# EAGLE board SparkFun_OpAmp_Breakout-LMV358_Panel_v16 (EAGLE 7.5.0), part 1 of 5
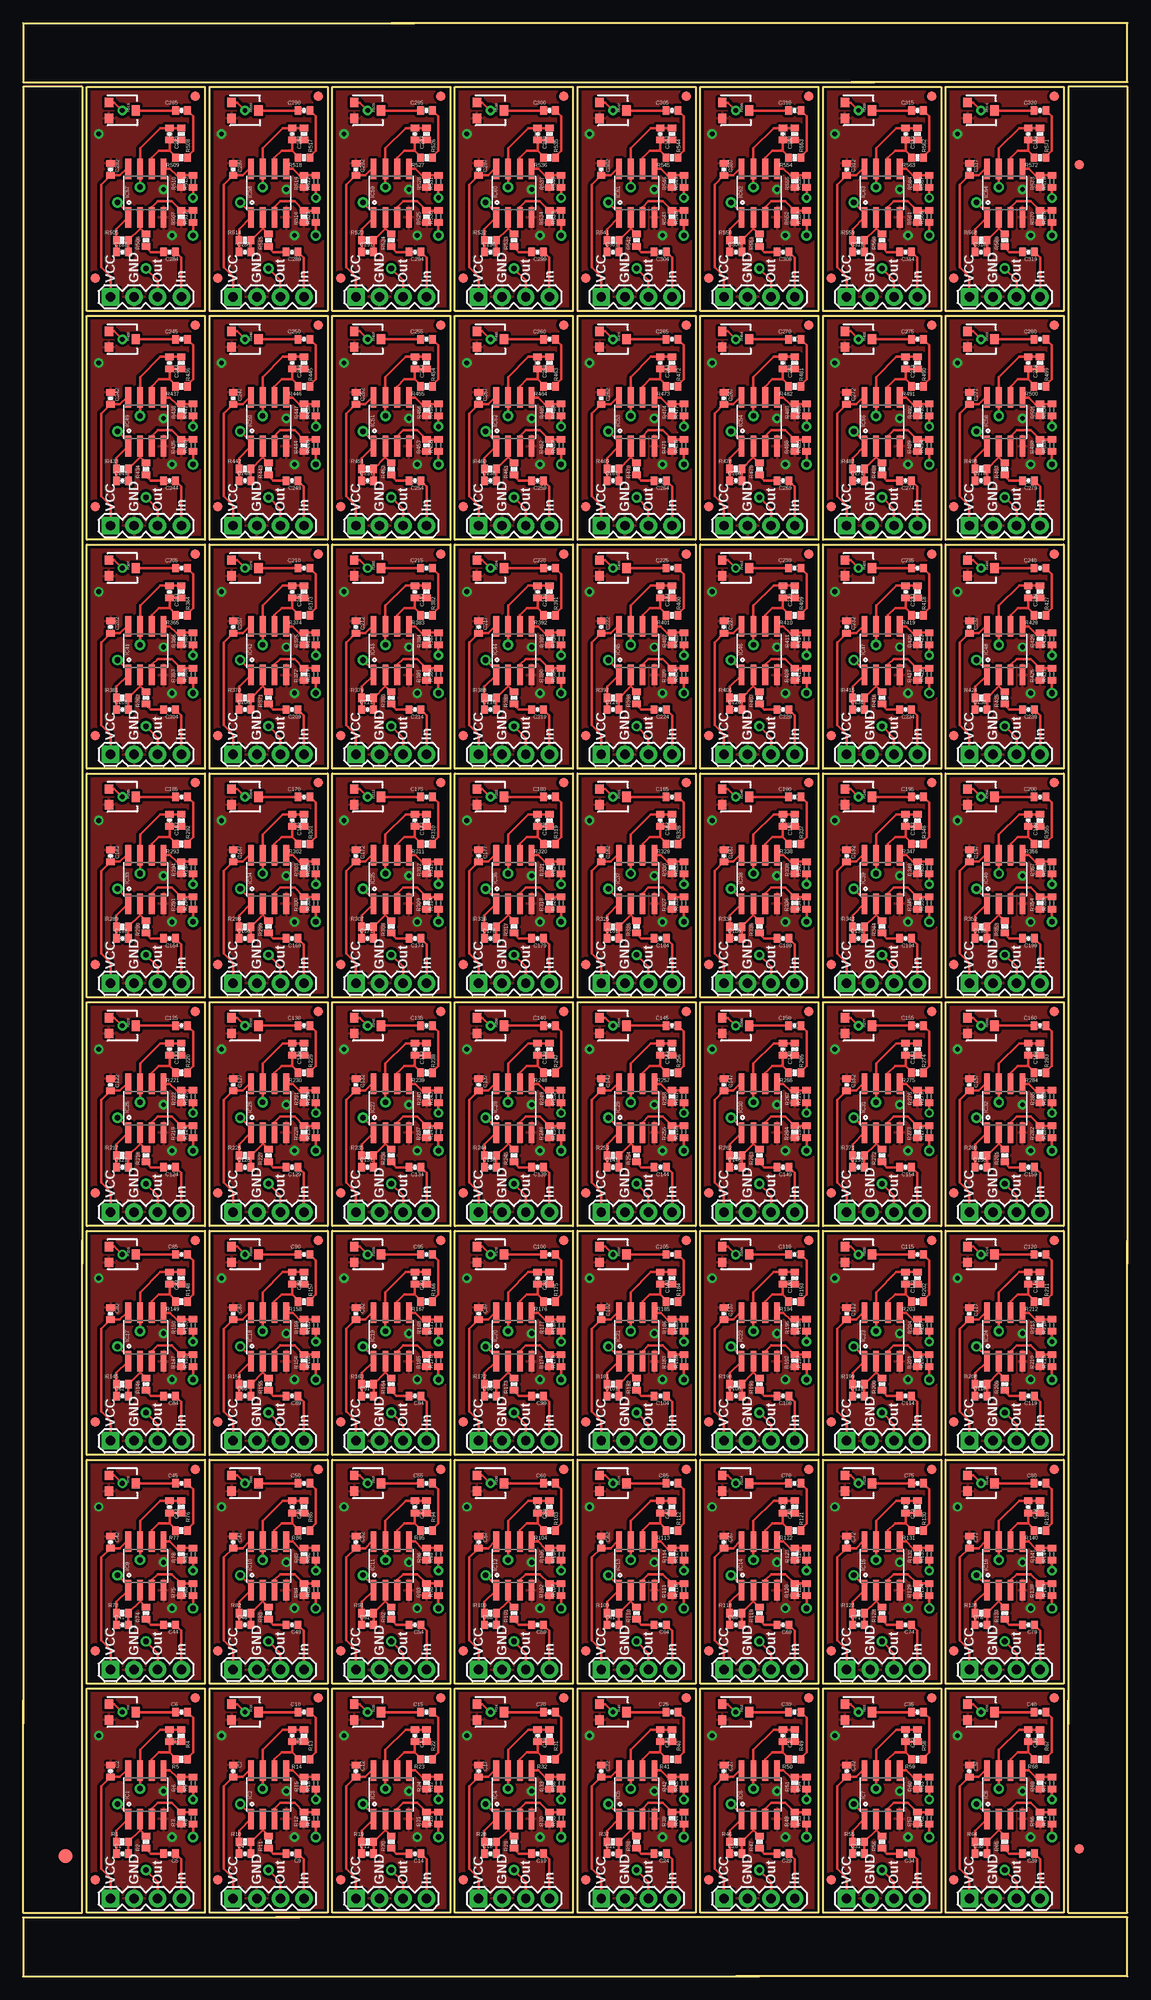
[diagram p0: board, top side]
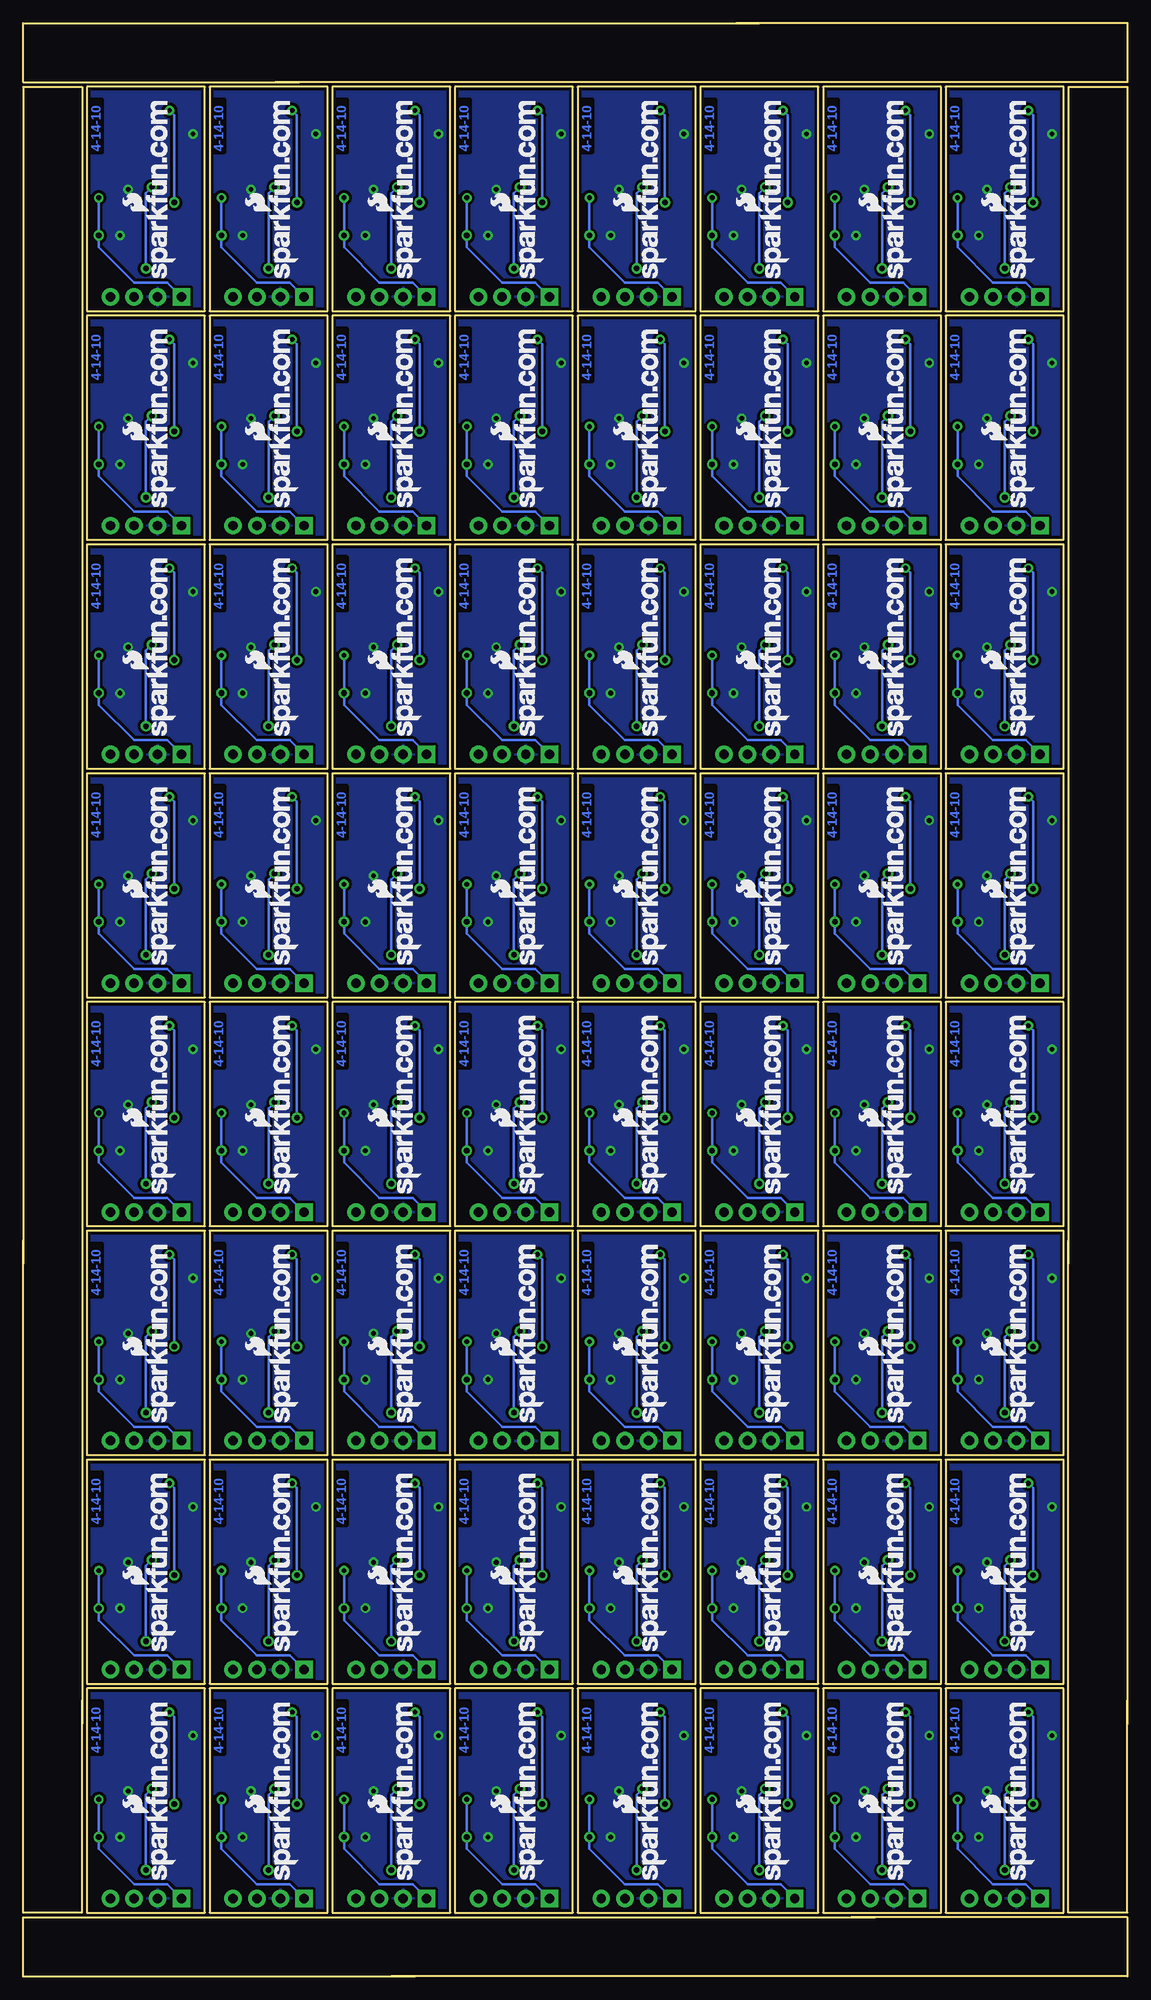
[diagram p1: board, bottom side, seen from below]

Size 118.87 x 210.31 mm. Coordinates in mm from the lower left corner, seen from the top.
Outline: 280 segments
Copper layers (1*16): Top 0.035mm / dielectric 1.5mm / Bottom 0.035mm
Design rules "SparkFun": minimum track width 8mil, minimum drill 20mil, track to track 8mil, track to pad 8mil, pad to pad 8mil, via to via 8mil, smd to smd 8mil, copper to edge 10mil, drill to drill 8mil, minimum pad ring 12mil, minimum via ring 10mil, stop-mask expansion 4mil, vias tented up to drill 25mil, thermal gap 10mil

## Footprints (pad centres in the part's own frame; a part is rotated, then mirrored left to right if it is on the bottom)
0402-CAP = smd 0.7 x 0.9: 1 -0.65,0; 2 0.65,0
FIDUCIAL-1X2 = smd 1 x 1: 1 0,0
FIDUCIAL-1.5X3 = smd 1.5 x 1.5: 1 0,0
SO08 = smd 0.61 x 2.21: 1 -1.905,-2.616; 2 -0.635,-2.616; 3 0.635,-2.616; 4 1.905,-2.616; 5 1.905,2.616; 6 0.635,2.616; 7 -0.635,2.616; 8 -1.905,2.616
1X04 = drill 1.016 pad 1.88 square: 1 0,0 | drill 1.016 pad 1.88: 2 2.54,0; 3 5.08,0; 4 7.62,0
0402-RES = smd 0.7 x 0.9: 1 -0.65,0; 2 0.65,0
TRIMPOT-3MM = smd 1 x 0.9: 1 -0.85,-1.45; 3 0.85,-1.45 | smd 1.1 x 0.9: 2 0,1.45
C0402 = smd 0.7 x 0.9: 1 -0.65,0; 2 0.65,0

## Placement (x,y rotation side)
C1  100pF  [0402-CAP]  10.67,13.21 180 top
C2  0.1uF  [0402-CAP]  9.4,22.1 90 top
C3  100pF  [0402-CAP]  15.75,25.91 90 top
C4  100pF  [0402-CAP]  23.88,13.21 180 top
C5  1uF  [0402-CAP]  15.75,13.21 180 top
C6  1uF  [0402-CAP]  17.02,28.45 180 top
C7  0.1uF  [0402-CAP]  22.61,22.1 90 top
C8  100pF  [0402-CAP]  28.96,25.91 90 top
C9  1uF  [0402-CAP]  28.96,13.21 180 top
C10  1uF  [0402-CAP]  30.23,28.45 180 top
C11  100pF  [0402-CAP]  37.08,13.21 180 top
C12  0.1uF  [0402-CAP]  35.81,22.1 90 top
C13  100pF  [0402-CAP]  42.16,25.91 90 top
C14  1uF  [0402-CAP]  42.16,13.21 180 top
C15  1uF  [0402-CAP]  43.43,28.45 180 top
C16  100pF  [0402-CAP]  50.29,13.21 180 top
C17  0.1uF  [0402-CAP]  49.02,22.1 90 top
C18  100pF  [0402-CAP]  55.37,25.91 90 top
C19  1uF  [0402-CAP]  55.37,13.21 180 top
C20  1uF  [0402-CAP]  56.64,28.45 180 top
C21  100pF  [0402-CAP]  63.5,13.21 180 top
C22  0.1uF  [0402-CAP]  62.23,22.1 90 top
C23  100pF  [0402-CAP]  68.58,25.91 90 top
C24  1uF  [0402-CAP]  68.58,13.21 180 top
C25  1uF  [0402-CAP]  69.85,28.45 180 top
C26  100pF  [0402-CAP]  76.71,13.21 180 top
C27  0.1uF  [0402-CAP]  75.44,22.1 90 top
C28  100pF  [0402-CAP]  81.79,25.91 90 top
C29  1uF  [0402-CAP]  81.79,13.21 180 top
C30  1uF  [0402-CAP]  83.06,28.45 180 top
C31  100pF  [0402-CAP]  89.92,13.21 180 top
C32  0.1uF  [0402-CAP]  88.65,22.1 90 top
C33  100pF  [0402-CAP]  95,25.91 90 top
C34  1uF  [0402-CAP]  95,13.21 180 top
C35  1uF  [0402-CAP]  96.27,28.45 180 top
C36  100pF  [0402-CAP]  103.12,13.21 180 top
C37  0.1uF  [0402-CAP]  101.85,22.1 90 top
C38  100pF  [0402-CAP]  108.2,25.91 90 top
C39  1uF  [0402-CAP]  108.2,13.21 180 top
C40  1uF  [0402-CAP]  109.47,28.45 180 top
C41  100pF  [0402-CAP]  10.67,37.85 180 top
C42  0.1uF  [0402-CAP]  9.4,46.74 90 top
C43  100pF  [0402-CAP]  15.75,50.55 90 top
C44  1uF  [0402-CAP]  15.75,37.85 180 top
C45  1uF  [0402-CAP]  17.02,53.09 180 top
C46  100pF  [0402-CAP]  23.88,37.85 180 top
C47  0.1uF  [0402-CAP]  22.61,46.74 90 top
C48  100pF  [0402-CAP]  28.96,50.55 90 top
C49  1uF  [0402-CAP]  28.96,37.85 180 top
C50  1uF  [0402-CAP]  30.23,53.09 180 top
C51  100pF  [0402-CAP]  37.08,37.85 180 top
C52  0.1uF  [0402-CAP]  35.81,46.74 90 top
C53  100pF  [0402-CAP]  42.16,50.55 90 top
C54  1uF  [0402-CAP]  42.16,37.85 180 top
C55  1uF  [0402-CAP]  43.43,53.09 180 top
C56  100pF  [0402-CAP]  50.29,37.85 180 top
C57  0.1uF  [0402-CAP]  49.02,46.74 90 top
C58  100pF  [0402-CAP]  55.37,50.55 90 top
C59  1uF  [0402-CAP]  55.37,37.85 180 top
C60  1uF  [0402-CAP]  56.64,53.09 180 top
C61  100pF  [0402-CAP]  63.5,37.85 180 top
C62  0.1uF  [0402-CAP]  62.23,46.74 90 top
C63  100pF  [0402-CAP]  68.58,50.55 90 top
C64  1uF  [0402-CAP]  68.58,37.85 180 top
C65  1uF  [0402-CAP]  69.85,53.09 180 top
C66  100pF  [0402-CAP]  76.71,37.85 180 top
C67  0.1uF  [0402-CAP]  75.44,46.74 90 top
C68  100pF  [0402-CAP]  81.79,50.55 90 top
C69  1uF  [0402-CAP]  81.79,37.85 180 top
C70  1uF  [0402-CAP]  83.06,53.09 180 top
C71  100pF  [0402-CAP]  89.92,37.85 180 top
C72  0.1uF  [0402-CAP]  88.65,46.74 90 top
C73  100pF  [0402-CAP]  95,50.55 90 top
C74  1uF  [0402-CAP]  95,37.85 180 top
C75  1uF  [0402-CAP]  96.27,53.09 180 top
C76  100pF  [0402-CAP]  103.12,37.85 180 top
C77  0.1uF  [0402-CAP]  101.85,46.74 90 top
C78  100pF  [0402-CAP]  108.2,50.55 90 top
C79  1uF  [0402-CAP]  108.2,37.85 180 top
C80  1uF  [0402-CAP]  109.47,53.09 180 top
C81  100pF  [0402-CAP]  10.67,62.48 180 top
C82  0.1uF  [0402-CAP]  9.4,71.37 90 top
C83  100pF  [0402-CAP]  15.75,75.18 90 top
C84  1uF  [0402-CAP]  15.75,62.48 180 top
C85  1uF  [0402-CAP]  17.02,77.72 180 top
C86  100pF  [0402-CAP]  23.88,62.48 180 top
C87  0.1uF  [0402-CAP]  22.61,71.37 90 top
C88  100pF  [0402-CAP]  28.96,75.18 90 top
C89  1uF  [0402-CAP]  28.96,62.48 180 top
C90  1uF  [0402-CAP]  30.23,77.72 180 top
C91  100pF  [0402-CAP]  37.08,62.48 180 top
C92  0.1uF  [0402-CAP]  35.81,71.37 90 top
C93  100pF  [0402-CAP]  42.16,75.18 90 top
C94  1uF  [0402-CAP]  42.16,62.48 180 top
C95  1uF  [0402-CAP]  43.43,77.72 180 top
C96  100pF  [0402-CAP]  50.29,62.48 180 top
C97  0.1uF  [0402-CAP]  49.02,71.37 90 top
C98  100pF  [0402-CAP]  55.37,75.18 90 top
C99  1uF  [0402-CAP]  55.37,62.48 180 top
C100  1uF  [0402-CAP]  56.64,77.72 180 top
C101  100pF  [0402-CAP]  63.5,62.48 180 top
C102  0.1uF  [0402-CAP]  62.23,71.37 90 top
C103  100pF  [0402-CAP]  68.58,75.18 90 top
C104  1uF  [0402-CAP]  68.58,62.48 180 top
C105  1uF  [0402-CAP]  69.85,77.72 180 top
C106  100pF  [0402-CAP]  76.71,62.48 180 top
C107  0.1uF  [0402-CAP]  75.44,71.37 90 top
C108  100pF  [0402-CAP]  81.79,75.18 90 top
C109  1uF  [0402-CAP]  81.79,62.48 180 top
C110  1uF  [0402-CAP]  83.06,77.72 180 top
C111  100pF  [0402-CAP]  89.92,62.48 180 top
C112  0.1uF  [0402-CAP]  88.65,71.37 90 top
C113  100pF  [0402-CAP]  95,75.18 90 top
C114  1uF  [0402-CAP]  95,62.48 180 top
C115  1uF  [0402-CAP]  96.27,77.72 180 top
C116  100pF  [0402-CAP]  103.12,62.48 180 top
C117  0.1uF  [0402-CAP]  101.85,71.37 90 top
C118  100pF  [0402-CAP]  108.2,75.18 90 top
C119  1uF  [0402-CAP]  108.2,62.48 180 top
C120  1uF  [0402-CAP]  109.47,77.72 180 top
C121  100pF  [0402-CAP]  10.67,87.12 180 top
C122  0.1uF  [0402-CAP]  9.4,96.01 90 top
C123  100pF  [0402-CAP]  15.75,99.82 90 top
C124  1uF  [0402-CAP]  15.75,87.12 180 top
C125  1uF  [0402-CAP]  17.02,102.36 180 top
C126  100pF  [0402-CAP]  23.88,87.12 180 top
C127  0.1uF  [0402-CAP]  22.61,96.01 90 top
C128  100pF  [0402-CAP]  28.96,99.82 90 top
C129  1uF  [0402-CAP]  28.96,87.12 180 top
C130  1uF  [0402-CAP]  30.23,102.36 180 top
C131  100pF  [0402-CAP]  37.08,87.12 180 top
C132  0.1uF  [0402-CAP]  35.81,96.01 90 top
C133  100pF  [0402-CAP]  42.16,99.82 90 top
C134  1uF  [0402-CAP]  42.16,87.12 180 top
C135  1uF  [0402-CAP]  43.43,102.36 180 top
C136  100pF  [0402-CAP]  50.29,87.12 180 top
C137  0.1uF  [0402-CAP]  49.02,96.01 90 top
C138  100pF  [0402-CAP]  55.37,99.82 90 top
C139  1uF  [0402-CAP]  55.37,87.12 180 top
C140  1uF  [0402-CAP]  56.64,102.36 180 top
C141  100pF  [0402-CAP]  63.5,87.12 180 top
C142  0.1uF  [0402-CAP]  62.23,96.01 90 top
C143  100pF  [0402-CAP]  68.58,99.82 90 top
C144  1uF  [0402-CAP]  68.58,87.12 180 top
C145  1uF  [0402-CAP]  69.85,102.36 180 top
C146  100pF  [0402-CAP]  76.71,87.12 180 top
C147  0.1uF  [0402-CAP]  75.44,96.01 90 top
C148  100pF  [0402-CAP]  81.79,99.82 90 top
C149  1uF  [0402-CAP]  81.79,87.12 180 top
C150  1uF  [0402-CAP]  83.06,102.36 180 top
C151  100pF  [0402-CAP]  89.92,87.12 180 top
C152  0.1uF  [0402-CAP]  88.65,96.01 90 top
C153  100pF  [0402-CAP]  95,99.82 90 top
C154  1uF  [0402-CAP]  95,87.12 180 top
C155  1uF  [0402-CAP]  96.27,102.36 180 top
C156  100pF  [0402-CAP]  103.12,87.12 180 top
C157  0.1uF  [0402-CAP]  101.85,96.01 90 top
C158  100pF  [0402-CAP]  108.2,99.82 90 top
C159  1uF  [0402-CAP]  108.2,87.12 180 top
C160  1uF  [0402-CAP]  109.47,102.36 180 top
C161  100pF  [0402-CAP]  10.67,111.76 180 top
C162  0.1uF  [0402-CAP]  9.4,120.65 90 top
C163  100pF  [0402-CAP]  15.75,124.46 90 top
C164  1uF  [0402-CAP]  15.75,111.76 180 top
C165  1uF  [0402-CAP]  17.02,127 180 top
C166  100pF  [0402-CAP]  23.88,111.76 180 top
C167  0.1uF  [0402-CAP]  22.61,120.65 90 top
C168  100pF  [0402-CAP]  28.96,124.46 90 top
C169  1uF  [0402-CAP]  28.96,111.76 180 top
C170  1uF  [0402-CAP]  30.23,127 180 top
C171  100pF  [0402-CAP]  37.08,111.76 180 top
C172  0.1uF  [0402-CAP]  35.81,120.65 90 top
C173  100pF  [0402-CAP]  42.16,124.46 90 top
C174  1uF  [0402-CAP]  42.16,111.76 180 top
C175  1uF  [0402-CAP]  43.43,127 180 top
C176  100pF  [0402-CAP]  50.29,111.76 180 top
C177  0.1uF  [0402-CAP]  49.02,120.65 90 top
C178  100pF  [0402-CAP]  55.37,124.46 90 top
C179  1uF  [0402-CAP]  55.37,111.76 180 top
C180  1uF  [0402-CAP]  56.64,127 180 top
C181  100pF  [0402-CAP]  63.5,111.76 180 top
C182  0.1uF  [0402-CAP]  62.23,120.65 90 top
C183  100pF  [0402-CAP]  68.58,124.46 90 top
C184  1uF  [0402-CAP]  68.58,111.76 180 top
C185  1uF  [0402-CAP]  69.85,127 180 top
C186  100pF  [0402-CAP]  76.71,111.76 180 top
C187  0.1uF  [0402-CAP]  75.44,120.65 90 top
C188  100pF  [0402-CAP]  81.79,124.46 90 top
C189  1uF  [0402-CAP]  81.79,111.76 180 top
C190  1uF  [0402-CAP]  83.06,127 180 top
C191  100pF  [0402-CAP]  89.92,111.76 180 top
C192  0.1uF  [0402-CAP]  88.65,120.65 90 top
C193  100pF  [0402-CAP]  95,124.46 90 top
C194  1uF  [0402-CAP]  95,111.76 180 top
C195  1uF  [0402-CAP]  96.27,127 180 top
C196  100pF  [0402-CAP]  103.12,111.76 180 top
C197  0.1uF  [0402-CAP]  101.85,120.65 90 top
C198  100pF  [0402-CAP]  108.2,124.46 90 top
C199  1uF  [0402-CAP]  108.2,111.76 180 top
C200  1uF  [0402-CAP]  109.47,127 180 top
C201  100pF  [0402-CAP]  10.67,136.4 180 top
C202  0.1uF  [0402-CAP]  9.4,145.29 90 top
C203  100pF  [0402-CAP]  15.75,149.1 90 top
C204  1uF  [0402-CAP]  15.75,136.4 180 top
C205  1uF  [0402-CAP]  17.02,151.64 180 top
C206  100pF  [0402-CAP]  23.88,136.4 180 top
C207  0.1uF  [0402-CAP]  22.61,145.29 90 top
C208  100pF  [0402-CAP]  28.96,149.1 90 top
C209  1uF  [0402-CAP]  28.96,136.4 180 top
C210  1uF  [0402-CAP]  30.23,151.64 180 top
C211  100pF  [0402-CAP]  37.08,136.4 180 top
C212  0.1uF  [0402-CAP]  35.81,145.29 90 top
C213  100pF  [0402-CAP]  42.16,149.1 90 top
C214  1uF  [0402-CAP]  42.16,136.4 180 top
C215  1uF  [0402-CAP]  43.43,151.64 180 top
C216  100pF  [0402-CAP]  50.29,136.4 180 top
C217  0.1uF  [0402-CAP]  49.02,145.29 90 top
C218  100pF  [0402-CAP]  55.37,149.1 90 top
C219  1uF  [0402-CAP]  55.37,136.4 180 top
C220  1uF  [0402-CAP]  56.64,151.64 180 top
C221  100pF  [0402-CAP]  63.5,136.4 180 top
C222  0.1uF  [0402-CAP]  62.23,145.29 90 top
C223  100pF  [0402-CAP]  68.58,149.1 90 top
C224  1uF  [0402-CAP]  68.58,136.4 180 top
C225  1uF  [0402-CAP]  69.85,151.64 180 top
C226  100pF  [0402-CAP]  76.71,136.4 180 top
C227  0.1uF  [0402-CAP]  75.44,145.29 90 top
C228  100pF  [0402-CAP]  81.79,149.1 90 top
C229  1uF  [0402-CAP]  81.79,136.4 180 top
C230  1uF  [0402-CAP]  83.06,151.64 180 top
C231  100pF  [0402-CAP]  89.92,136.4 180 top
C232  0.1uF  [0402-CAP]  88.65,145.29 90 top
C233  100pF  [0402-CAP]  95,149.1 90 top
C234  1uF  [0402-CAP]  95,136.4 180 top
C235  1uF  [0402-CAP]  96.27,151.64 180 top
C236  100pF  [0402-CAP]  103.12,136.4 180 top
C237  0.1uF  [0402-CAP]  101.85,145.29 90 top
C238  100pF  [0402-CAP]  108.2,149.1 90 top
C239  1uF  [0402-CAP]  108.2,136.4 180 top
C240  1uF  [0402-CAP]  109.47,151.64 180 top
C241  100pF  [0402-CAP]  10.67,161.04 180 top
C242  0.1uF  [0402-CAP]  9.4,169.93 90 top
C243  100pF  [0402-CAP]  15.75,173.74 90 top
C244  1uF  [0402-CAP]  15.75,161.04 180 top
C245  1uF  [0402-CAP]  17.02,176.28 180 top
C246  100pF  [0402-CAP]  23.88,161.04 180 top
C247  0.1uF  [0402-CAP]  22.61,169.93 90 top
C248  100pF  [0402-CAP]  28.96,173.74 90 top
C249  1uF  [0402-CAP]  28.96,161.04 180 top
C250  1uF  [0402-CAP]  30.23,176.28 180 top
C251  100pF  [0402-CAP]  37.08,161.04 180 top
C252  0.1uF  [0402-CAP]  35.81,169.93 90 top
C253  100pF  [0402-CAP]  42.16,173.74 90 top
C254  1uF  [0402-CAP]  42.16,161.04 180 top
C255  1uF  [0402-CAP]  43.43,176.28 180 top
C256  100pF  [0402-CAP]  50.29,161.04 180 top
C257  0.1uF  [0402-CAP]  49.02,169.93 90 top
C258  100pF  [0402-CAP]  55.37,173.74 90 top
C259  1uF  [0402-CAP]  55.37,161.04 180 top
C260  1uF  [0402-CAP]  56.64,176.28 180 top
C261  100pF  [0402-CAP]  63.5,161.04 180 top
C262  0.1uF  [0402-CAP]  62.23,169.93 90 top
C263  100pF  [0402-CAP]  68.58,173.74 90 top
C264  1uF  [0402-CAP]  68.58,161.04 180 top
C265  1uF  [0402-CAP]  69.85,176.28 180 top
C266  100pF  [0402-CAP]  76.71,161.04 180 top
C267  0.1uF  [0402-CAP]  75.44,169.93 90 top
C268  100pF  [0402-CAP]  81.79,173.74 90 top
C269  1uF  [0402-CAP]  81.79,161.04 180 top
C270  1uF  [0402-CAP]  83.06,176.28 180 top
C271  100pF  [0402-CAP]  89.92,161.04 180 top
C272  0.1uF  [0402-CAP]  88.65,169.93 90 top
C273  100pF  [0402-CAP]  95,173.74 90 top
C274  1uF  [0402-CAP]  95,161.04 180 top
C275  1uF  [0402-CAP]  96.27,176.28 180 top
C276  100pF  [0402-CAP]  103.12,161.04 180 top
C277  0.1uF  [0402-CAP]  101.85,169.93 90 top
C278  100pF  [0402-CAP]  108.2,173.74 90 top
C279  1uF  [0402-CAP]  108.2,161.04 180 top
C280  1uF  [0402-CAP]  109.47,176.28 180 top
C281  100pF  [0402-CAP]  10.67,185.67 180 top
C282  0.1uF  [0402-CAP]  9.4,194.56 90 top
C283  100pF  [0402-CAP]  15.75,198.37 90 top
C284  1uF  [0402-CAP]  15.75,185.67 180 top
C285  1uF  [0402-CAP]  17.02,200.91 180 top
C286  100pF  [0402-CAP]  23.88,185.67 180 top
C287  0.1uF  [0402-CAP]  22.61,194.56 90 top
C288  100pF  [0402-CAP]  28.96,198.37 90 top
C289  1uF  [0402-CAP]  28.96,185.67 180 top
C290  1uF  [0402-CAP]  30.23,200.91 180 top
C291  100pF  [0402-CAP]  37.08,185.67 180 top
C292  0.1uF  [0402-CAP]  35.81,194.56 90 top
C293  100pF  [0402-CAP]  42.16,198.37 90 top
C294  1uF  [0402-CAP]  42.16,185.67 180 top
C295  1uF  [0402-CAP]  43.43,200.91 180 top
C296  100pF  [0402-CAP]  50.29,185.67 180 top
C297  0.1uF  [0402-CAP]  49.02,194.56 90 top
C298  100pF  [0402-CAP]  55.37,198.37 90 top
C299  1uF  [0402-CAP]  55.37,185.67 180 top
C300  1uF  [0402-CAP]  56.64,200.91 180 top
C301  100pF  [0402-CAP]  63.5,185.67 180 top
C302  0.1uF  [0402-CAP]  62.23,194.56 90 top
C303  100pF  [0402-CAP]  68.58,198.37 90 top
C304  1uF  [0402-CAP]  68.58,185.67 180 top
C305  1uF  [0402-CAP]  69.85,200.91 180 top
C306  100pF  [0402-CAP]  76.71,185.67 180 top
C307  0.1uF  [0402-CAP]  75.44,194.56 90 top
C308  100pF  [0402-CAP]  81.79,198.37 90 top
C309  1uF  [0402-CAP]  81.79,185.67 180 top
C310  1uF  [0402-CAP]  83.06,200.91 180 top
C311  100pF  [0402-CAP]  89.92,185.67 180 top
C312  0.1uF  [0402-CAP]  88.65,194.56 90 top
C313  100pF  [0402-CAP]  95,198.37 90 top
C314  1uF  [0402-CAP]  95,185.67 180 top
C315  1uF  [0402-CAP]  96.27,200.91 180 top
C316  100pF  [0402-CAP]  103.12,185.67 180 top
C317  0.1uF  [0402-CAP]  101.85,194.56 90 top
C318  100pF  [0402-CAP]  108.2,198.37 90 top
C319  1uF  [0402-CAP]  108.2,185.67 180 top
C320  1uF  [0402-CAP]  109.47,200.91 180 top
E$1  [FIDUCIAL-1X2]  18.54,29.97 0 top
E$2  [FIDUCIAL-1X2]  7.75,10.41 0 top
E$3  [FIDUCIAL-1X2]  31.75,29.97 0 top
E$4  [FIDUCIAL-1X2]  20.95,10.41 0 top
E$5  [FIDUCIAL-1X2]  44.96,29.97 0 top
E$6  [FIDUCIAL-1X2]  34.16,10.41 0 top
E$7  [FIDUCIAL-1X2]  58.17,29.97 0 top
E$8  [FIDUCIAL-1X2]  47.37,10.41 0 top
E$9  [FIDUCIAL-1X2]  71.37,29.97 0 top
E$10  [FIDUCIAL-1X2]  60.58,10.41 0 top
E$11  [FIDUCIAL-1X2]  84.58,29.97 0 top
E$12  [FIDUCIAL-1X2]  73.79,10.41 0 top
E$13  [FIDUCIAL-1X2]  97.79,29.97 0 top
E$14  [FIDUCIAL-1X2]  87,10.41 0 top
E$15  [FIDUCIAL-1X2]  111,29.97 0 top
E$16  [FIDUCIAL-1X2]  100.2,10.41 0 top
E$17  [FIDUCIAL-1X2]  18.54,54.61 0 top
E$18  [FIDUCIAL-1X2]  7.75,35.05 0 top
E$19  [FIDUCIAL-1X2]  31.75,54.61 0 top
E$20  [FIDUCIAL-1X2]  20.95,35.05 0 top
E$21  [FIDUCIAL-1X2]  44.96,54.61 0 top
E$22  [FIDUCIAL-1X2]  34.16,35.05 0 top
E$23  [FIDUCIAL-1X2]  58.17,54.61 0 top
E$24  [FIDUCIAL-1X2]  47.37,35.05 0 top
E$25  [FIDUCIAL-1X2]  71.37,54.61 0 top
E$26  [FIDUCIAL-1X2]  60.58,35.05 0 top
E$27  [FIDUCIAL-1X2]  84.58,54.61 0 top
E$28  [FIDUCIAL-1X2]  73.79,35.05 0 top
E$29  [FIDUCIAL-1X2]  97.79,54.61 0 top
E$30  [FIDUCIAL-1X2]  87,35.05 0 top
E$31  [FIDUCIAL-1X2]  111,54.61 0 top
E$32  [FIDUCIAL-1X2]  100.2,35.05 0 top
E$33  [FIDUCIAL-1X2]  18.54,79.25 0 top
E$34  [FIDUCIAL-1X2]  7.75,59.69 0 top
E$35  [FIDUCIAL-1X2]  31.75,79.25 0 top
E$36  [FIDUCIAL-1X2]  20.95,59.69 0 top
E$37  [FIDUCIAL-1X2]  44.96,79.25 0 top
E$38  [FIDUCIAL-1X2]  34.16,59.69 0 top
E$39  [FIDUCIAL-1X2]  58.17,79.25 0 top
E$40  [FIDUCIAL-1X2]  47.37,59.69 0 top
E$41  [FIDUCIAL-1X2]  71.37,79.25 0 top
E$42  [FIDUCIAL-1X2]  60.58,59.69 0 top
E$43  [FIDUCIAL-1X2]  84.58,79.25 0 top
E$44  [FIDUCIAL-1X2]  73.79,59.69 0 top
E$45  [FIDUCIAL-1X2]  97.79,79.25 0 top
E$46  [FIDUCIAL-1X2]  87,59.69 0 top
E$47  [FIDUCIAL-1X2]  111,79.25 0 top
E$48  [FIDUCIAL-1X2]  100.2,59.69 0 top
E$49  [FIDUCIAL-1X2]  18.54,103.89 0 top
E$50  [FIDUCIAL-1X2]  7.75,84.33 0 top
E$51  [FIDUCIAL-1X2]  31.75,103.89 0 top
E$52  [FIDUCIAL-1X2]  20.95,84.33 0 top
E$53  [FIDUCIAL-1X2]  44.96,103.89 0 top
E$54  [FIDUCIAL-1X2]  34.16,84.33 0 top
E$55  [FIDUCIAL-1X2]  58.17,103.89 0 top
E$56  [FIDUCIAL-1X2]  47.37,84.33 0 top
E$57  [FIDUCIAL-1X2]  71.37,103.89 0 top
E$58  [FIDUCIAL-1X2]  60.58,84.33 0 top
E$59  [FIDUCIAL-1X2]  84.58,103.89 0 top
E$60  [FIDUCIAL-1X2]  73.79,84.33 0 top
E$61  [FIDUCIAL-1X2]  97.79,103.89 0 top
E$62  [FIDUCIAL-1X2]  87,84.33 0 top
E$63  [FIDUCIAL-1X2]  111,103.89 0 top
E$64  [FIDUCIAL-1X2]  100.2,84.33 0 top
E$65  [FIDUCIAL-1X2]  18.54,128.52 0 top
E$66  [FIDUCIAL-1X2]  7.75,108.97 0 top
E$67  [FIDUCIAL-1X2]  31.75,128.52 0 top
E$68  [FIDUCIAL-1X2]  20.95,108.97 0 top
E$69  [FIDUCIAL-1X2]  44.96,128.52 0 top
E$70  [FIDUCIAL-1X2]  34.16,108.97 0 top
E$71  [FIDUCIAL-1X2]  58.17,128.52 0 top
E$72  [FIDUCIAL-1X2]  47.37,108.97 0 top
E$73  [FIDUCIAL-1X2]  71.37,128.52 0 top
E$74  [FIDUCIAL-1X2]  60.58,108.97 0 top
E$75  [FIDUCIAL-1X2]  84.58,128.52 0 top
E$76  [FIDUCIAL-1X2]  73.79,108.97 0 top
E$77  [FIDUCIAL-1X2]  97.79,128.52 0 top
E$78  [FIDUCIAL-1X2]  87,108.97 0 top
E$79  [FIDUCIAL-1X2]  111,128.52 0 top
E$80  [FIDUCIAL-1X2]  100.2,108.97 0 top
E$81  [FIDUCIAL-1X2]  18.54,153.16 0 top
E$82  [FIDUCIAL-1X2]  7.75,133.6 0 top
E$83  [FIDUCIAL-1X2]  31.75,153.16 0 top
E$84  [FIDUCIAL-1X2]  20.95,133.6 0 top
E$85  [FIDUCIAL-1X2]  44.96,153.16 0 top
E$86  [FIDUCIAL-1X2]  34.16,133.6 0 top
E$87  [FIDUCIAL-1X2]  58.17,153.16 0 top
E$88  [FIDUCIAL-1X2]  47.37,133.6 0 top
E$89  [FIDUCIAL-1X2]  71.37,153.16 0 top
E$90  [FIDUCIAL-1X2]  60.58,133.6 0 top
E$91  [FIDUCIAL-1X2]  84.58,153.16 0 top
E$92  [FIDUCIAL-1X2]  73.79,133.6 0 top
E$93  [FIDUCIAL-1X2]  97.79,153.16 0 top
E$94  [FIDUCIAL-1X2]  87,133.6 0 top
E$95  [FIDUCIAL-1X2]  111,153.16 0 top
E$96  [FIDUCIAL-1X2]  100.2,133.6 0 top
E$97  [FIDUCIAL-1X2]  18.54,177.8 0 top
E$98  [FIDUCIAL-1X2]  7.75,158.24 0 top
E$99  [FIDUCIAL-1X2]  31.75,177.8 0 top
E$100  [FIDUCIAL-1X2]  20.95,158.24 0 top
E$101  [FIDUCIAL-1X2]  44.96,177.8 0 top
E$102  [FIDUCIAL-1X2]  34.16,158.24 0 top
E$103  [FIDUCIAL-1X2]  58.17,177.8 0 top
E$104  [FIDUCIAL-1X2]  47.37,158.24 0 top
E$105  [FIDUCIAL-1X2]  71.37,177.8 0 top
E$106  [FIDUCIAL-1X2]  60.58,158.24 0 top
E$107  [FIDUCIAL-1X2]  84.58,177.8 0 top
E$108  [FIDUCIAL-1X2]  73.79,158.24 0 top
E$109  [FIDUCIAL-1X2]  97.79,177.8 0 top
E$110  [FIDUCIAL-1X2]  87,158.24 0 top
E$111  [FIDUCIAL-1X2]  111,177.8 0 top
E$112  [FIDUCIAL-1X2]  100.2,158.24 0 top
E$113  [FIDUCIAL-1X2]  18.54,202.44 0 top
E$114  [FIDUCIAL-1X2]  7.75,182.88 0 top
E$115  [FIDUCIAL-1X2]  31.75,202.44 0 top
E$116  [FIDUCIAL-1X2]  20.95,182.88 0 top
E$117  [FIDUCIAL-1X2]  44.96,202.44 0 top
E$118  [FIDUCIAL-1X2]  34.16,182.88 0 top
E$119  [FIDUCIAL-1X2]  58.17,202.44 0 top
E$120  [FIDUCIAL-1X2]  47.37,182.88 0 top
E$121  [FIDUCIAL-1X2]  71.37,202.44 0 top
E$122  [FIDUCIAL-1X2]  60.58,182.88 0 top
E$123  [FIDUCIAL-1X2]  84.58,202.44 0 top
E$124  [FIDUCIAL-1X2]  73.79,182.88 0 top
E$125  [FIDUCIAL-1X2]  97.79,202.44 0 top
E$126  [FIDUCIAL-1X2]  87,182.88 0 top
E$127  [FIDUCIAL-1X2]  111,202.44 0 top
E$128  [FIDUCIAL-1X2]  100.2,182.88 0 top
E$129  [FIDUCIAL-1.5X3]  4.57,12.95 0 top
E$133  [FIDUCIAL-1X2]  113.67,13.72 0 top
E$134  [FIDUCIAL-1X2]  113.67,195.07 180 top
IC1  LMV358  [SO08]  13.21,19.56 0 top
IC2  LMV358  [SO08]  26.42,19.56 0 top
IC3  LMV358  [SO08]  39.62,19.56 0 top
IC4  LMV358  [SO08]  52.83,19.56 0 top
IC5  LMV358  [SO08]  66.04,19.56 0 top
IC6  LMV358  [SO08]  79.25,19.56 0 top
IC7  LMV358  [SO08]  92.46,19.56 0 top
IC8  LMV358  [SO08]  105.66,19.56 0 top
IC9  LMV358  [SO08]  13.21,44.2 0 top
IC10  LMV358  [SO08]  26.42,44.2 0 top
IC11  LMV358  [SO08]  39.62,44.2 0 top
IC12  LMV358  [SO08]  52.83,44.2 0 top
IC13  LMV358  [SO08]  66.04,44.2 0 top
IC14  LMV358  [SO08]  79.25,44.2 0 top
IC15  LMV358  [SO08]  92.46,44.2 0 top
IC16  LMV358  [SO08]  105.66,44.2 0 top
IC17  LMV358  [SO08]  13.21,68.83 0 top
IC18  LMV358  [SO08]  26.42,68.83 0 top
IC19  LMV358  [SO08]  39.62,68.83 0 top
IC20  LMV358  [SO08]  52.83,68.83 0 top
IC21  LMV358  [SO08]  66.04,68.83 0 top
IC22  LMV358  [SO08]  79.25,68.83 0 top
IC23  LMV358  [SO08]  92.46,68.83 0 top
IC24  LMV358  [SO08]  105.66,68.83 0 top
IC25  LMV358  [SO08]  13.21,93.47 0 top
IC26  LMV358  [SO08]  26.42,93.47 0 top
IC27  LMV358  [SO08]  39.62,93.47 0 top
IC28  LMV358  [SO08]  52.83,93.47 0 top
IC29  LMV358  [SO08]  66.04,93.47 0 top
IC30  LMV358  [SO08]  79.25,93.47 0 top
IC31  LMV358  [SO08]  92.46,93.47 0 top
IC32  LMV358  [SO08]  105.66,93.47 0 top
IC33  LMV358  [SO08]  13.21,118.11 0 top
IC34  LMV358  [SO08]  26.42,118.11 0 top
IC35  LMV358  [SO08]  39.62,118.11 0 top
IC36  LMV358  [SO08]  52.83,118.11 0 top
IC37  LMV358  [SO08]  66.04,118.11 0 top
IC38  LMV358  [SO08]  79.25,118.11 0 top
IC39  LMV358  [SO08]  92.46,118.11 0 top
IC40  LMV358  [SO08]  105.66,118.11 0 top
IC41  LMV358  [SO08]  13.21,142.75 0 top
IC42  LMV358  [SO08]  26.42,142.75 0 top
IC43  LMV358  [SO08]  39.62,142.75 0 top
IC44  LMV358  [SO08]  52.83,142.75 0 top
IC45  LMV358  [SO08]  66.04,142.75 0 top
IC46  LMV358  [SO08]  79.25,142.75 0 top
IC47  LMV358  [SO08]  92.46,142.75 0 top
IC48  LMV358  [SO08]  105.66,142.75 0 top
IC49  LMV358  [SO08]  13.21,167.39 0 top
IC50  LMV358  [SO08]  26.42,167.39 0 top
IC51  LMV358  [SO08]  39.62,167.39 0 top
IC52  LMV358  [SO08]  52.83,167.39 0 top
IC53  LMV358  [SO08]  66.04,167.39 0 top
IC54  LMV358  [SO08]  79.25,167.39 0 top
IC55  LMV358  [SO08]  92.46,167.39 0 top
IC56  LMV358  [SO08]  105.66,167.39 0 top
IC57  LMV358  [SO08]  13.21,192.02 0 top
IC58  LMV358  [SO08]  26.42,192.02 0 top
IC59  LMV358  [SO08]  39.62,192.02 0 top
IC60  LMV358  [SO08]  52.83,192.02 0 top
IC61  LMV358  [SO08]  66.04,192.02 0 top
IC62  LMV358  [SO08]  79.25,192.02 0 top
IC63  LMV358  [SO08]  92.46,192.02 0 top
IC64  LMV358  [SO08]  105.66,192.02 0 top
JP1  [1X04]  9.4,8.38 0 top
JP2  [1X04]  22.61,8.38 0 top
JP3  [1X04]  35.81,8.38 0 top
JP4  [1X04]  49.02,8.38 0 top
JP5  [1X04]  62.23,8.38 0 top
JP6  [1X04]  75.44,8.38 0 top
JP7  [1X04]  88.65,8.38 0 top
JP8  [1X04]  101.85,8.38 0 top
JP9  [1X04]  9.4,33.02 0 top
JP10  [1X04]  22.61,33.02 0 top
JP11  [1X04]  35.81,33.02 0 top
JP12  [1X04]  49.02,33.02 0 top
JP13  [1X04]  62.23,33.02 0 top
JP14  [1X04]  75.44,33.02 0 top
JP15  [1X04]  88.65,33.02 0 top
JP16  [1X04]  101.85,33.02 0 top
JP17  [1X04]  9.4,57.66 0 top
JP18  [1X04]  22.61,57.66 0 top
JP19  [1X04]  35.81,57.66 0 top
JP20  [1X04]  49.02,57.66 0 top
JP21  [1X04]  62.23,57.66 0 top
JP22  [1X04]  75.44,57.66 0 top
JP23  [1X04]  88.65,57.66 0 top
JP24  [1X04]  101.85,57.66 0 top
JP25  [1X04]  9.4,82.3 0 top
JP26  [1X04]  22.61,82.3 0 top
JP27  [1X04]  35.81,82.3 0 top
JP28  [1X04]  49.02,82.3 0 top
JP29  [1X04]  62.23,82.3 0 top
JP30  [1X04]  75.44,82.3 0 top
JP31  [1X04]  88.65,82.3 0 top
JP32  [1X04]  101.85,82.3 0 top
JP33  [1X04]  9.4,106.93 0 top
JP34  [1X04]  22.61,106.93 0 top
JP35  [1X04]  35.81,106.93 0 top
JP36  [1X04]  49.02,106.93 0 top
JP37  [1X04]  62.23,106.93 0 top
JP38  [1X04]  75.44,106.93 0 top
JP39  [1X04]  88.65,106.93 0 top
JP40  [1X04]  101.85,106.93 0 top
JP41  [1X04]  9.4,131.57 0 top
JP42  [1X04]  22.61,131.57 0 top
JP43  [1X04]  35.81,131.57 0 top
JP44  [1X04]  49.02,131.57 0 top
JP45  [1X04]  62.23,131.57 0 top
JP46  [1X04]  75.44,131.57 0 top
JP47  [1X04]  88.65,131.57 0 top
JP48  [1X04]  101.85,131.57 0 top
JP49  [1X04]  9.4,156.21 0 top
JP50  [1X04]  22.61,156.21 0 top
JP51  [1X04]  35.81,156.21 0 top
JP52  [1X04]  49.02,156.21 0 top
JP53  [1X04]  62.23,156.21 0 top
JP54  [1X04]  75.44,156.21 0 top
JP55  [1X04]  88.65,156.21 0 top
JP56  [1X04]  101.85,156.21 0 top
JP57  [1X04]  9.4,180.85 0 top
JP58  [1X04]  22.61,180.85 0 top
JP59  [1X04]  35.81,180.85 0 top
JP60  [1X04]  49.02,180.85 0 top
JP61  [1X04]  62.23,180.85 0 top
JP62  [1X04]  75.44,180.85 0 top
JP63  [1X04]  88.65,180.85 0 top
JP64  [1X04]  101.85,180.85 0 top
R1  100K  [0402-RES]  10.67,14.48 180 top
R2  10K  [0402-RES]  13.21,14.48 90 top
R3  10K  [0402-RES]  17.02,17.02 90 top
R4  100K  [0402-RES]  17.02,25.91 270 top
R5  10K  [0402-RES]  17.02,23.37 180 top
R6  10K  [0402-RES]  17.02,20.83 90 top
R7  100K  [TRIMPOT-3MM]  10.67,28.45 270 top
R8  10K  [C0402]  18.29,17.02 90 top
R9  10K  [C0402]  18.29,20.83 90 top
R10  100K  [0402-RES]  23.88,14.48 180 top
R11  10K  [0402-RES]  26.42,14.48 90 top
R12  10K  [0402-RES]  30.23,17.02 90 top
R13  100K  [0402-RES]  30.23,25.91 270 top
R14  10K  [0402-RES]  30.23,23.37 180 top
R15  10K  [0402-RES]  30.23,20.83 90 top
R16  100K  [TRIMPOT-3MM]  23.88,28.45 270 top
R17  10K  [C0402]  31.5,17.02 90 top
R18  10K  [C0402]  31.5,20.83 90 top
R19  100K  [0402-RES]  37.08,14.48 180 top
R20  10K  [0402-RES]  39.62,14.48 90 top
R21  10K  [0402-RES]  43.43,17.02 90 top
R22  100K  [0402-RES]  43.43,25.91 270 top
R23  10K  [0402-RES]  43.43,23.37 180 top
R24  10K  [0402-RES]  43.43,20.83 90 top
R25  100K  [TRIMPOT-3MM]  37.08,28.45 270 top
R26  10K  [C0402]  44.7,17.02 90 top
R27  10K  [C0402]  44.7,20.83 90 top
R28  100K  [0402-RES]  50.29,14.48 180 top
R29  10K  [0402-RES]  52.83,14.48 90 top
R30  10K  [0402-RES]  56.64,17.02 90 top
R31  100K  [0402-RES]  56.64,25.91 270 top
R32  10K  [0402-RES]  56.64,23.37 180 top
R33  10K  [0402-RES]  56.64,20.83 90 top
R34  100K  [TRIMPOT-3MM]  50.29,28.45 270 top
R35  10K  [C0402]  57.91,17.02 90 top
R36  10K  [C0402]  57.91,20.83 90 top
R37  100K  [0402-RES]  63.5,14.48 180 top
R38  10K  [0402-RES]  66.04,14.48 90 top
R39  10K  [0402-RES]  69.85,17.02 90 top
R40  100K  [0402-RES]  69.85,25.91 270 top
R41  10K  [0402-RES]  69.85,23.37 180 top
R42  10K  [0402-RES]  69.85,20.83 90 top
R43  100K  [TRIMPOT-3MM]  63.5,28.45 270 top
R44  10K  [C0402]  71.12,17.02 90 top
R45  10K  [C0402]  71.12,20.83 90 top
R46  100K  [0402-RES]  76.71,14.48 180 top
R47  10K  [0402-RES]  79.25,14.48 90 top
R48  10K  [0402-RES]  83.06,17.02 90 top
R49  100K  [0402-RES]  83.06,25.91 270 top
R50  10K  [0402-RES]  83.06,23.37 180 top
R51  10K  [0402-RES]  83.06,20.83 90 top
R52  100K  [TRIMPOT-3MM]  76.71,28.45 270 top
R53  10K  [C0402]  84.33,17.02 90 top
R54  10K  [C0402]  84.33,20.83 90 top
R55  100K  [0402-RES]  89.92,14.48 180 top
R56  10K  [0402-RES]  92.46,14.48 90 top
R57  10K  [0402-RES]  96.27,17.02 90 top
R58  100K  [0402-RES]  96.27,25.91 270 top
R59  10K  [0402-RES]  96.27,23.37 180 top
R60  10K  [0402-RES]  96.27,20.83 90 top
R61  100K  [TRIMPOT-3MM]  89.92,28.45 270 top
R62  10K  [C0402]  97.54,17.02 90 top
R63  10K  [C0402]  97.54,20.83 90 top
R64  100K  [0402-RES]  103.12,14.48 180 top
R65  10K  [0402-RES]  105.66,14.48 90 top
R66  10K  [0402-RES]  109.47,17.02 90 top
R67  100K  [0402-RES]  109.47,25.91 270 top
R68  10K  [0402-RES]  109.47,23.37 180 top
R69  10K  [0402-RES]  109.47,20.83 90 top
R70  100K  [TRIMPOT-3MM]  103.12,28.45 270 top
R71  10K  [C0402]  110.74,17.02 90 top
R72  10K  [C0402]  110.74,20.83 90 top
R73  100K  [0402-RES]  10.67,39.12 180 top
R74  10K  [0402-RES]  13.21,39.12 90 top
R75  10K  [0402-RES]  17.02,41.66 90 top
R76  100K  [0402-RES]  17.02,50.55 270 top
R77  10K  [0402-RES]  17.02,48.01 180 top
R78  10K  [0402-RES]  17.02,45.47 90 top
R79  100K  [TRIMPOT-3MM]  10.67,53.09 270 top
R80  10K  [C0402]  18.29,41.66 90 top
R81  10K  [C0402]  18.29,45.47 90 top
R82  100K  [0402-RES]  23.88,39.12 180 top
R83  10K  [0402-RES]  26.42,39.12 90 top
R84  10K  [0402-RES]  30.23,41.66 90 top
R85  100K  [0402-RES]  30.23,50.55 270 top
R86  10K  [0402-RES]  30.23,48.01 180 top
R87  10K  [0402-RES]  30.23,45.47 90 top
R88  100K  [TRIMPOT-3MM]  23.88,53.09 270 top
R89  10K  [C0402]  31.5,41.66 90 top
R90  10K  [C0402]  31.5,45.47 90 top
R91  100K  [0402-RES]  37.08,39.12 180 top
R92  10K  [0402-RES]  39.62,39.12 90 top
R93  10K  [0402-RES]  43.43,41.66 90 top
R94  100K  [0402-RES]  43.43,50.55 270 top
R95  10K  [0402-RES]  43.43,48.01 180 top
R96  10K  [0402-RES]  43.43,45.47 90 top
R97  100K  [TRIMPOT-3MM]  37.08,53.09 270 top
R98  10K  [C0402]  44.7,41.66 90 top
R99  10K  [C0402]  44.7,45.47 90 top
R100  100K  [0402-RES]  50.29,39.12 180 top
R101  10K  [0402-RES]  52.83,39.12 90 top
R102  10K  [0402-RES]  56.64,41.66 90 top
R103  100K  [0402-RES]  56.64,50.55 270 top
R104  10K  [0402-RES]  56.64,48.01 180 top
R105  10K  [0402-RES]  56.64,45.47 90 top
R106  100K  [TRIMPOT-3MM]  50.29,53.09 270 top
R107  10K  [C0402]  57.91,41.66 90 top
R108  10K  [C0402]  57.91,45.47 90 top
R109  100K  [0402-RES]  63.5,39.12 180 top
R110  10K  [0402-RES]  66.04,39.12 90 top
R111  10K  [0402-RES]  69.85,41.66 90 top
R112  100K  [0402-RES]  69.85,50.55 270 top
R113  10K  [0402-RES]  69.85,48.01 180 top
R114  10K  [0402-RES]  69.85,45.47 90 top
R115  100K  [TRIMPOT-3MM]  63.5,53.09 270 top
R116  10K  [C0402]  71.12,41.66 90 top
R117  10K  [C0402]  71.12,45.47 90 top
R118  100K  [0402-RES]  76.71,39.12 180 top
R119  10K  [0402-RES]  79.25,39.12 90 top
R120  10K  [0402-RES]  83.06,41.66 90 top
R121  100K  [0402-RES]  83.06,50.55 270 top
R122  10K  [0402-RES]  83.06,48.01 180 top
R123  10K  [0402-RES]  83.06,45.47 90 top
R124  100K  [TRIMPOT-3MM]  76.71,53.09 270 top
R125  10K  [C0402]  84.33,41.66 90 top
R126  10K  [C0402]  84.33,45.47 90 top
R127  100K  [0402-RES]  89.92,39.12 180 top
R128  10K  [0402-RES]  92.46,39.12 90 top
R129  10K  [0402-RES]  96.27,41.66 90 top
R130  100K  [0402-RES]  96.27,50.55 270 top
R131  10K  [0402-RES]  96.27,48.01 180 top
R132  10K  [0402-RES]  96.27,45.47 90 top
R133  100K  [TRIMPOT-3MM]  89.92,53.09 270 top
R134  10K  [C0402]  97.54,41.66 90 top
R135  10K  [C0402]  97.54,45.47 90 top
R136  100K  [0402-RES]  103.12,39.12 180 top
R137  10K  [0402-RES]  105.66,39.12 90 top
R138  10K  [0402-RES]  109.47,41.66 90 top
R139  100K  [0402-RES]  109.47,50.55 270 top
R140  10K  [0402-RES]  109.47,48.01 180 top
R141  10K  [0402-RES]  109.47,45.47 90 top
R142  100K  [TRIMPOT-3MM]  103.12,53.09 270 top
R143  10K  [C0402]  110.74,41.66 90 top
R144  10K  [C0402]  110.74,45.47 90 top
R145  100K  [0402-RES]  10.67,63.75 180 top
R146  10K  [0402-RES]  13.21,63.75 90 top
R147  10K  [0402-RES]  17.02,66.29 90 top
R148  100K  [0402-RES]  17.02,75.18 270 top
R149  10K  [0402-RES]  17.02,72.64 180 top
R150  10K  [0402-RES]  17.02,70.1 90 top
R151  100K  [TRIMPOT-3MM]  10.67,77.72 270 top
R152  10K  [C0402]  18.29,66.29 90 top
R153  10K  [C0402]  18.29,70.1 90 top
R154  100K  [0402-RES]  23.88,63.75 180 top
R155  10K  [0402-RES]  26.42,63.75 90 top
R156  10K  [0402-RES]  30.23,66.29 90 top
R157  100K  [0402-RES]  30.23,75.18 270 top
R158  10K  [0402-RES]  30.23,72.64 180 top
R159  10K  [0402-RES]  30.23,70.1 90 top
R160  100K  [TRIMPOT-3MM]  23.88,77.72 270 top
R161  10K  [C0402]  31.5,66.29 90 top
R162  10K  [C0402]  31.5,70.1 90 top
R163  100K  [0402-RES]  37.08,63.75 180 top
R164  10K  [0402-RES]  39.62,63.75 90 top
R165  10K  [0402-RES]  43.43,66.29 90 top
R166  100K  [0402-RES]  43.43,75.18 270 top
R167  10K  [0402-RES]  43.43,72.64 180 top
R168  10K  [0402-RES]  43.43,70.1 90 top
R169  100K  [TRIMPOT-3MM]  37.08,77.72 270 top
R170  10K  [C0402]  44.7,66.29 90 top
R171  10K  [C0402]  44.7,70.1 90 top
R172  100K  [0402-RES]  50.29,63.75 180 top
R173  10K  [0402-RES]  52.83,63.75 90 top
R174  10K  [0402-RES]  56.64,66.29 90 top
R175  100K  [0402-RES]  56.64,75.18 270 top
R176  10K  [0402-RES]  56.64,72.64 180 top
R177  10K  [0402-RES]  56.64,70.1 90 top
R178  100K  [TRIMPOT-3MM]  50.29,77.72 270 top
R179  10K  [C0402]  57.91,66.29 90 top
R180  10K  [C0402]  57.91,70.1 90 top
R181  100K  [0402-RES]  63.5,63.75 180 top
R182  10K  [0402-RES]  66.04,63.75 90 top
R183  10K  [0402-RES]  69.85,66.29 90 top
R184  100K  [0402-RES]  69.85,75.18 270 top
R185  10K  [0402-RES]  69.85,72.64 180 top
R186  10K  [0402-RES]  69.85,70.1 90 top
R187  100K  [TRIMPOT-3MM]  63.5,77.72 270 top
R188  10K  [C0402]  71.12,66.29 90 top
R189  10K  [C0402]  71.12,70.1 90 top
R190  100K  [0402-RES]  76.71,63.75 180 top
R191  10K  [0402-RES]  79.25,63.75 90 top
R192  10K  [0402-RES]  83.06,66.29 90 top
R193  100K  [0402-RES]  83.06,75.18 270 top
R194  10K  [0402-RES]  83.06,72.64 180 top
R195  10K  [0402-RES]  83.06,70.1 90 top
R196  100K  [TRIMPOT-3MM]  76.71,77.72 270 top
R197  10K  [C0402]  84.33,66.29 90 top
R198  10K  [C0402]  84.33,70.1 90 top
R199  100K  [0402-RES]  89.92,63.75 180 top
R200  10K  [0402-RES]  92.46,63.75 90 top
R201  10K  [0402-RES]  96.27,66.29 90 top
R202  100K  [0402-RES]  96.27,75.18 270 top
R203  10K  [0402-RES]  96.27,72.64 180 top
R204  10K  [0402-RES]  96.27,70.1 90 top
R205  100K  [TRIMPOT-3MM]  89.92,77.72 270 top
R206  10K  [C0402]  97.54,66.29 90 top
R207  10K  [C0402]  97.54,70.1 90 top
R208  100K  [0402-RES]  103.12,63.75 180 top
R209  10K  [0402-RES]  105.66,63.75 90 top
R210  10K  [0402-RES]  109.47,66.29 90 top
R211  100K  [0402-RES]  109.47,75.18 270 top
R212  10K  [0402-RES]  109.47,72.64 180 top
R213  10K  [0402-RES]  109.47,70.1 90 top
R214  100K  [TRIMPOT-3MM]  103.12,77.72 270 top
R215  10K  [C0402]  110.74,66.29 90 top
R216  10K  [C0402]  110.74,70.1 90 top
R217  100K  [0402-RES]  10.67,88.39 180 top
R218  10K  [0402-RES]  13.21,88.39 90 top
R219  10K  [0402-RES]  17.02,90.93 90 top
R220  100K  [0402-RES]  17.02,99.82 270 top
R221  10K  [0402-RES]  17.02,97.28 180 top
R222  10K  [0402-RES]  17.02,94.74 90 top
R223  100K  [TRIMPOT-3MM]  10.67,102.36 270 top
R224  10K  [C0402]  18.29,90.93 90 top
R225  10K  [C0402]  18.29,94.74 90 top
R226  100K  [0402-RES]  23.88,88.39 180 top
R227  10K  [0402-RES]  26.42,88.39 90 top
R228  10K  [0402-RES]  30.23,90.93 90 top
R229  100K  [0402-RES]  30.23,99.82 270 top
R230  10K  [0402-RES]  30.23,97.28 180 top
R231  10K  [0402-RES]  30.23,94.74 90 top
R232  100K  [TRIMPOT-3MM]  23.88,102.36 270 top
R233  10K  [C0402]  31.5,90.93 90 top
R234  10K  [C0402]  31.5,94.74 90 top
R235  100K  [0402-RES]  37.08,88.39 180 top
R236  10K  [0402-RES]  39.62,88.39 90 top
R237  10K  [0402-RES]  43.43,90.93 90 top
R238  100K  [0402-RES]  43.43,99.82 270 top
R239  10K  [0402-RES]  43.43,97.28 180 top
R240  10K  [0402-RES]  43.43,94.74 90 top
R241  100K  [TRIMPOT-3MM]  37.08,102.36 270 top
R242  10K  [C0402]  44.7,90.93 90 top
R243  10K  [C0402]  44.7,94.74 90 top
R244  100K  [0402-RES]  50.29,88.39 180 top
R245  10K  [0402-RES]  52.83,88.39 90 top
R246  10K  [0402-RES]  56.64,90.93 90 top
R247  100K  [0402-RES]  56.64,99.82 270 top
R248  10K  [0402-RES]  56.64,97.28 180 top
R249  10K  [0402-RES]  56.64,94.74 90 top
R250  100K  [TRIMPOT-3MM]  50.29,102.36 270 top
R251  10K  [C0402]  57.91,90.93 90 top
R252  10K  [C0402]  57.91,94.74 90 top
R253  100K  [0402-RES]  63.5,88.39 180 top
R254  10K  [0402-RES]  66.04,88.39 90 top
R255  10K  [0402-RES]  69.85,90.93 90 top
R256  100K  [0402-RES]  69.85,99.82 270 top
R257  10K  [0402-RES]  69.85,97.28 180 top
R258  10K  [0402-RES]  69.85,94.74 90 top
R259  100K  [TRIMPOT-3MM]  63.5,102.36 270 top
R260  10K  [C0402]  71.12,90.93 90 top
R261  10K  [C0402]  71.12,94.74 90 top
R262  100K  [0402-RES]  76.71,88.39 180 top
R263  10K  [0402-RES]  79.25,88.39 90 top
R264  10K  [0402-RES]  83.06,90.93 90 top
R265  100K  [0402-RES]  83.06,99.82 270 top
R266  10K  [0402-RES]  83.06,97.28 180 top
R267  10K  [0402-RES]  83.06,94.74 90 top
R268  100K  [TRIMPOT-3MM]  76.71,102.36 270 top
R269  10K  [C0402]  84.33,90.93 90 top
R270  10K  [C0402]  84.33,94.74 90 top
R271  100K  [0402-RES]  89.92,88.39 180 top
R272  10K  [0402-RES]  92.46,88.39 90 top
R273  10K  [0402-RES]  96.27,90.93 90 top
R274  100K  [0402-RES]  96.27,99.82 270 top
R275  10K  [0402-RES]  96.27,97.28 180 top
R276  10K  [0402-RES]  96.27,94.74 90 top
R277  100K  [TRIMPOT-3MM]  89.92,102.36 270 top
R278  10K  [C0402]  97.54,90.93 90 top
R279  10K  [C0402]  97.54,94.74 90 top
R280  100K  [0402-RES]  103.12,88.39 180 top
R281  10K  [0402-RES]  105.66,88.39 90 top
R282  10K  [0402-RES]  109.47,90.93 90 top
R283  100K  [0402-RES]  109.47,99.82 270 top
R284  10K  [0402-RES]  109.47,97.28 180 top
R285  10K  [0402-RES]  109.47,94.74 90 top
R286  100K  [TRIMPOT-3MM]  103.12,102.36 270 top
R287  10K  [C0402]  110.74,90.93 90 top
R288  10K  [C0402]  110.74,94.74 90 top
R289  100K  [0402-RES]  10.67,113.03 180 top
R290  10K  [0402-RES]  13.21,113.03 90 top
R291  10K  [0402-RES]  17.02,115.57 90 top
R292  100K  [0402-RES]  17.02,124.46 270 top
R293  10K  [0402-RES]  17.02,121.92 180 top
R294  10K  [0402-RES]  17.02,119.38 90 top
R295  100K  [TRIMPOT-3MM]  10.67,127 270 top
R296  10K  [C0402]  18.29,115.57 90 top
R297  10K  [C0402]  18.29,119.38 90 top
R298  100K  [0402-RES]  23.88,113.03 180 top
R299  10K  [0402-RES]  26.42,113.03 90 top
R300  10K  [0402-RES]  30.23,115.57 90 top
R301  100K  [0402-RES]  30.23,124.46 270 top
R302  10K  [0402-RES]  30.23,121.92 180 top
R303  10K  [0402-RES]  30.23,119.38 90 top
R304  100K  [TRIMPOT-3MM]  23.88,127 270 top
R305  10K  [C0402]  31.5,115.57 90 top
R306  10K  [C0402]  31.5,119.38 90 top
R307  100K  [0402-RES]  37.08,113.03 180 top
R308  10K  [0402-RES]  39.62,113.03 90 top
R309  10K  [0402-RES]  43.43,115.57 90 top
R310  100K  [0402-RES]  43.43,124.46 270 top
R311  10K  [0402-RES]  43.43,121.92 180 top
R312  10K  [0402-RES]  43.43,119.38 90 top
R313  100K  [TRIMPOT-3MM]  37.08,127 270 top
R314  10K  [C0402]  44.7,115.57 90 top
R315  10K  [C0402]  44.7,119.38 90 top
R316  100K  [0402-RES]  50.29,113.03 180 top
R317  10K  [0402-RES]  52.83,113.03 90 top
R318  10K  [0402-RES]  56.64,115.57 90 top
R319  100K  [0402-RES]  56.64,124.46 270 top
R320  10K  [0402-RES]  56.64,121.92 180 top
R321  10K  [0402-RES]  56.64,119.38 90 top
R322  100K  [TRIMPOT-3MM]  50.29,127 270 top
R323  10K  [C0402]  57.91,115.57 90 top
R324  10K  [C0402]  57.91,119.38 90 top
R325  100K  [0402-RES]  63.5,113.03 180 top
R326  10K  [0402-RES]  66.04,113.03 90 top
R327  10K  [0402-RES]  69.85,115.57 90 top
R328  100K  [0402-RES]  69.85,124.46 270 top
R329  10K  [0402-RES]  69.85,121.92 180 top
R330  10K  [0402-RES]  69.85,119.38 90 top
R331  100K  [TRIMPOT-3MM]  63.5,127 270 top
R332  10K  [C0402]  71.12,115.57 90 top
R333  10K  [C0402]  71.12,119.38 90 top
R334  100K  [0402-RES]  76.71,113.03 180 top
R335  10K  [0402-RES]  79.25,113.03 90 top
R336  10K  [0402-RES]  83.06,115.57 90 top
R337  100K  [0402-RES]  83.06,124.46 270 top
R338  10K  [0402-RES]  83.06,121.92 180 top
R339  10K  [0402-RES]  83.06,119.38 90 top
R340  100K  [TRIMPOT-3MM]  76.71,127 270 top
R341  10K  [C0402]  84.33,115.57 90 top
R342  10K  [C0402]  84.33,119.38 90 top
R343  100K  [0402-RES]  89.92,113.03 180 top
R344  10K  [0402-RES]  92.46,113.03 90 top
R345  10K  [0402-RES]  96.27,115.57 90 top
R346  100K  [0402-RES]  96.27,124.46 270 top
R347  10K  [0402-RES]  96.27,121.92 180 top
R348  10K  [0402-RES]  96.27,119.38 90 top
R349  100K  [TRIMPOT-3MM]  89.92,127 270 top
R350  10K  [C0402]  97.54,115.57 90 top
R351  10K  [C0402]  97.54,119.38 90 top
R352  100K  [0402-RES]  103.12,113.03 180 top
R353  10K  [0402-RES]  105.66,113.03 90 top
R354  10K  [0402-RES]  109.47,115.57 90 top
R355  100K  [0402-RES]  109.47,124.46 270 top
R356  10K  [0402-RES]  109.47,121.92 180 top
R357  10K  [0402-RES]  109.47,119.38 90 top
R358  100K  [TRIMPOT-3MM]  103.12,127 270 top
R359  10K  [C0402]  110.74,115.57 90 top
R360  10K  [C0402]  110.74,119.38 90 top
R361  100K  [0402-RES]  10.67,137.67 180 top
R362  10K  [0402-RES]  13.21,137.67 90 top
R363  10K  [0402-RES]  17.02,140.21 90 top
R364  100K  [0402-RES]  17.02,149.1 270 top
R365  10K  [0402-RES]  17.02,146.56 180 top
R366  10K  [0402-RES]  17.02,144.02 90 top
R367  100K  [TRIMPOT-3MM]  10.67,151.64 270 top
R368  10K  [C0402]  18.29,140.21 90 top
R369  10K  [C0402]  18.29,144.02 90 top
R370  100K  [0402-RES]  23.88,137.67 180 top
R371  10K  [0402-RES]  26.42,137.67 90 top
R372  10K  [0402-RES]  30.23,140.21 90 top
R373  100K  [0402-RES]  30.23,149.1 270 top
R374  10K  [0402-RES]  30.23,146.56 180 top
R375  10K  [0402-RES]  30.23,144.02 90 top
R376  100K  [TRIMPOT-3MM]  23.88,151.64 270 top
R377  10K  [C0402]  31.5,140.21 90 top
R378  10K  [C0402]  31.5,144.02 90 top
R379  100K  [0402-RES]  37.08,137.67 180 top
R380  10K  [0402-RES]  39.62,137.67 90 top
R381  10K  [0402-RES]  43.43,140.21 90 top
R382  100K  [0402-RES]  43.43,149.1 270 top
R383  10K  [0402-RES]  43.43,146.56 180 top
R384  10K  [0402-RES]  43.43,144.02 90 top
R385  100K  [TRIMPOT-3MM]  37.08,151.64 270 top
R386  10K  [C0402]  44.7,140.21 90 top
R387  10K  [C0402]  44.7,144.02 90 top
R388  100K  [0402-RES]  50.29,137.67 180 top
R389  10K  [0402-RES]  52.83,137.67 90 top
R390  10K  [0402-RES]  56.64,140.21 90 top
R391  100K  [0402-RES]  56.64,149.1 270 top
R392  10K  [0402-RES]  56.64,146.56 180 top
R393  10K  [0402-RES]  56.64,144.02 90 top
R394  100K  [TRIMPOT-3MM]  50.29,151.64 270 top
R395  10K  [C0402]  57.91,140.21 90 top
R396  10K  [C0402]  57.91,144.02 90 top
R397  100K  [0402-RES]  63.5,137.67 180 top
R398  10K  [0402-RES]  66.04,137.67 90 top
R399  10K  [0402-RES]  69.85,140.21 90 top
R400  100K  [0402-RES]  69.85,149.1 270 top
R401  10K  [0402-RES]  69.85,146.56 180 top
R402  10K  [0402-RES]  69.85,144.02 90 top
R403  100K  [TRIMPOT-3MM]  63.5,151.64 270 top
R404  10K  [C0402]  71.12,140.21 90 top
R405  10K  [C0402]  71.12,144.02 90 top
R406  100K  [0402-RES]  76.71,137.67 180 top
R407  10K  [0402-RES]  79.25,137.67 90 top
R408  10K  [0402-RES]  83.06,140.21 90 top
R409  100K  [0402-RES]  83.06,149.1 270 top
R410  10K  [0402-RES]  83.06,146.56 180 top
R411  10K  [0402-RES]  83.06,144.02 90 top
R412  100K  [TRIMPOT-3MM]  76.71,151.64 270 top
R413  10K  [C0402]  84.33,140.21 90 top
R414  10K  [C0402]  84.33,144.02 90 top
R415  100K  [0402-RES]  89.92,137.67 180 top
R416  10K  [0402-RES]  92.46,137.67 90 top
R417  10K  [0402-RES]  96.27,140.21 90 top
R418  100K  [0402-RES]  96.27,149.1 270 top
R419  10K  [0402-RES]  96.27,146.56 180 top
R420  10K  [0402-RES]  96.27,144.02 90 top
R421  100K  [TRIMPOT-3MM]  89.92,151.64 270 top
R422  10K  [C0402]  97.54,140.21 90 top
R423  10K  [C0402]  97.54,144.02 90 top
R424  100K  [0402-RES]  103.12,137.67 180 top
R425  10K  [0402-RES]  105.66,137.67 90 top
R426  10K  [0402-RES]  109.47,140.21 90 top
R427  100K  [0402-RES]  109.47,149.1 270 top
R428  10K  [0402-RES]  109.47,146.56 180 top
R429  10K  [0402-RES]  109.47,144.02 90 top
R430  100K  [TRIMPOT-3MM]  103.12,151.64 270 top
R431  10K  [C0402]  110.74,140.21 90 top
R432  10K  [C0402]  110.74,144.02 90 top
R433  100K  [0402-RES]  10.67,162.31 180 top
R434  10K  [0402-RES]  13.21,162.31 90 top
R435  10K  [0402-RES]  17.02,164.85 90 top
R436  100K  [0402-RES]  17.02,173.74 270 top
R437  10K  [0402-RES]  17.02,171.2 180 top
R438  10K  [0402-RES]  17.02,168.66 90 top
R439  100K  [TRIMPOT-3MM]  10.67,176.28 270 top
R440  10K  [C0402]  18.29,164.85 90 top
R441  10K  [C0402]  18.29,168.66 90 top
R442  100K  [0402-RES]  23.88,162.31 180 top
R443  10K  [0402-RES]  26.42,162.31 90 top
R444  10K  [0402-RES]  30.23,164.85 90 top
R445  100K  [0402-RES]  30.23,173.74 270 top
R446  10K  [0402-RES]  30.23,171.2 180 top
R447  10K  [0402-RES]  30.23,168.66 90 top
R448  100K  [TRIMPOT-3MM]  23.88,176.28 270 top
R449  10K  [C0402]  31.5,164.85 90 top
R450  10K  [C0402]  31.5,168.66 90 top
R451  100K  [0402-RES]  37.08,162.31 180 top
R452  10K  [0402-RES]  39.62,162.31 90 top
R453  10K  [0402-RES]  43.43,164.85 90 top
R454  100K  [0402-RES]  43.43,173.74 270 top
R455  10K  [0402-RES]  43.43,171.2 180 top
R456  10K  [0402-RES]  43.43,168.66 90 top
R457  100K  [TRIMPOT-3MM]  37.08,176.28 270 top
R458  10K  [C0402]  44.7,164.85 90 top
R459  10K  [C0402]  44.7,168.66 90 top
R460  100K  [0402-RES]  50.29,162.31 180 top
R461  10K  [0402-RES]  52.83,162.31 90 top
R462  10K  [0402-RES]  56.64,164.85 90 top
R463  100K  [0402-RES]  56.64,173.74 270 top
R464  10K  [0402-RES]  56.64,171.2 180 top
R465  10K  [0402-RES]  56.64,168.66 90 top
R466  100K  [TRIMPOT-3MM]  50.29,176.28 270 top
R467  10K  [C0402]  57.91,164.85 90 top
R468  10K  [C0402]  57.91,168.66 90 top
R469  100K  [0402-RES]  63.5,162.31 180 top
R470  10K  [0402-RES]  66.04,162.31 90 top
R471  10K  [0402-RES]  69.85,164.85 90 top
R472  100K  [0402-RES]  69.85,173.74 270 top
R473  10K  [0402-RES]  69.85,171.2 180 top
R474  10K  [0402-RES]  69.85,168.66 90 top
R475  100K  [TRIMPOT-3MM]  63.5,176.28 270 top
R476  10K  [C0402]  71.12,164.85 90 top
R477  10K  [C0402]  71.12,168.66 90 top
R478  100K  [0402-RES]  76.71,162.31 180 top
R479  10K  [0402-RES]  79.25,162.31 90 top
R480  10K  [0402-RES]  83.06,164.85 90 top
R481  100K  [0402-RES]  83.06,173.74 270 top
R482  10K  [0402-RES]  83.06,171.2 180 top
R483  10K  [0402-RES]  83.06,168.66 90 top
R484  100K  [TRIMPOT-3MM]  76.71,176.28 270 top
R485  10K  [C0402]  84.33,164.85 90 top
R486  10K  [C0402]  84.33,168.66 90 top
R487  100K  [0402-RES]  89.92,162.31 180 top
R488  10K  [0402-RES]  92.46,162.31 90 top
R489  10K  [0402-RES]  96.27,164.85 90 top
R490  100K  [0402-RES]  96.27,173.74 270 top
R491  10K  [0402-RES]  96.27,171.2 180 top
R492  10K  [0402-RES]  96.27,168.66 90 top
R493  100K  [TRIMPOT-3MM]  89.92,176.28 270 top
R494  10K  [C0402]  97.54,164.85 90 top
R495  10K  [C0402]  97.54,168.66 90 top
R496  100K  [0402-RES]  103.12,162.31 180 top
R497  10K  [0402-RES]  105.66,162.31 90 top
R498  10K  [0402-RES]  109.47,164.85 90 top
R499  100K  [0402-RES]  109.47,173.74 270 top
R500  10K  [0402-RES]  109.47,171.2 180 top
R501  10K  [0402-RES]  109.47,168.66 90 top
R502  100K  [TRIMPOT-3MM]  103.12,176.28 270 top
R503  10K  [C0402]  110.74,164.85 90 top
R504  10K  [C0402]  110.74,168.66 90 top
R505  100K  [0402-RES]  10.67,186.94 180 top
R506  10K  [0402-RES]  13.21,186.94 90 top
R507  10K  [0402-RES]  17.02,189.48 90 top
R508  100K  [0402-RES]  17.02,198.37 270 top
R509  10K  [0402-RES]  17.02,195.83 180 top
R510  10K  [0402-RES]  17.02,193.29 90 top
R511  100K  [TRIMPOT-3MM]  10.67,200.91 270 top
R512  10K  [C0402]  18.29,189.48 90 top
R513  10K  [C0402]  18.29,193.29 90 top
R514  100K  [0402-RES]  23.88,186.94 180 top
R515  10K  [0402-RES]  26.42,186.94 90 top
R516  10K  [0402-RES]  30.23,189.48 90 top
R517  100K  [0402-RES]  30.23,198.37 270 top
R518  10K  [0402-RES]  30.23,195.83 180 top
R519  10K  [0402-RES]  30.23,193.29 90 top
R520  100K  [TRIMPOT-3MM]  23.88,200.91 270 top
R521  10K  [C0402]  31.5,189.48 90 top
R522  10K  [C0402]  31.5,193.29 90 top
R523  100K  [0402-RES]  37.08,186.94 180 top
R524  10K  [0402-RES]  39.62,186.94 90 top
R525  10K  [0402-RES]  43.43,189.48 90 top
R526  100K  [0402-RES]  43.43,198.37 270 top
R527  10K  [0402-RES]  43.43,195.83 180 top
R528  10K  [0402-RES]  43.43,193.29 90 top
R529  100K  [TRIMPOT-3MM]  37.08,200.91 270 top
R530  10K  [C0402]  44.7,189.48 90 top
R531  10K  [C0402]  44.7,193.29 90 top
R532  100K  [0402-RES]  50.29,186.94 180 top
R533  10K  [0402-RES]  52.83,186.94 90 top
R534  10K  [0402-RES]  56.64,189.48 90 top
R535  100K  [0402-RES]  56.64,198.37 270 top
R536  10K  [0402-RES]  56.64,195.83 180 top
R537  10K  [0402-RES]  56.64,193.29 90 top
R538  100K  [TRIMPOT-3MM]  50.29,200.91 270 top
R539  10K  [C0402]  57.91,189.48 90 top
R540  10K  [C0402]  57.91,193.29 90 top
R541  100K  [0402-RES]  63.5,186.94 180 top
R542  10K  [0402-RES]  66.04,186.94 90 top
R543  10K  [0402-RES]  69.85,189.48 90 top
R544  100K  [0402-RES]  69.85,198.37 270 top
R545  10K  [0402-RES]  69.85,195.83 180 top
R546  10K  [0402-RES]  69.85,193.29 90 top
R547  100K  [TRIMPOT-3MM]  63.5,200.91 270 top
R548  10K  [C0402]  71.12,189.48 90 top
R549  10K  [C0402]  71.12,193.29 90 top
R550  100K  [0402-RES]  76.71,186.94 180 top
R551  10K  [0402-RES]  79.25,186.94 90 top
R552  10K  [0402-RES]  83.06,189.48 90 top
R553  100K  [0402-RES]  83.06,198.37 270 top
R554  10K  [0402-RES]  83.06,195.83 180 top
R555  10K  [0402-RES]  83.06,193.29 90 top
R556  100K  [TRIMPOT-3MM]  76.71,200.91 270 top
R557  10K  [C0402]  84.33,189.48 90 top
R558  10K  [C0402]  84.33,193.29 90 top
R559  100K  [0402-RES]  89.92,186.94 180 top
R560  10K  [0402-RES]  92.46,186.94 90 top
R561  10K  [0402-RES]  96.27,189.48 90 top
R562  100K  [0402-RES]  96.27,198.37 270 top
R563  10K  [0402-RES]  96.27,195.83 180 top
R564  10K  [0402-RES]  96.27,193.29 90 top
R565  100K  [TRIMPOT-3MM]  89.92,200.91 270 top
R566  10K  [C0402]  97.54,189.48 90 top
R567  10K  [C0402]  97.54,193.29 90 top
R568  100K  [0402-RES]  103.12,186.94 180 top
R569  10K  [0402-RES]  105.66,186.94 90 top
R570  10K  [0402-RES]  109.47,189.48 90 top
R571  100K  [0402-RES]  109.47,198.37 270 top
R572  10K  [0402-RES]  109.47,195.83 180 top
R573  10K  [0402-RES]  109.47,193.29 90 top
R574  100K  [TRIMPOT-3MM]  103.12,200.91 270 top